# Altium PCB PCB - OSSM Wireless v0.4.pcbdoc (part 2 of 2)
Units mm, origin at the board's own origin, x right, y up, seen from the top; angles counter-clockwise.
Board outline 142.7 x 72.7 mm, 4 copper layers (Top Layer, 3v3 - all domains, GND, Bottom Layer); 90 components, 64 nets, 371 pads, 137 vias.
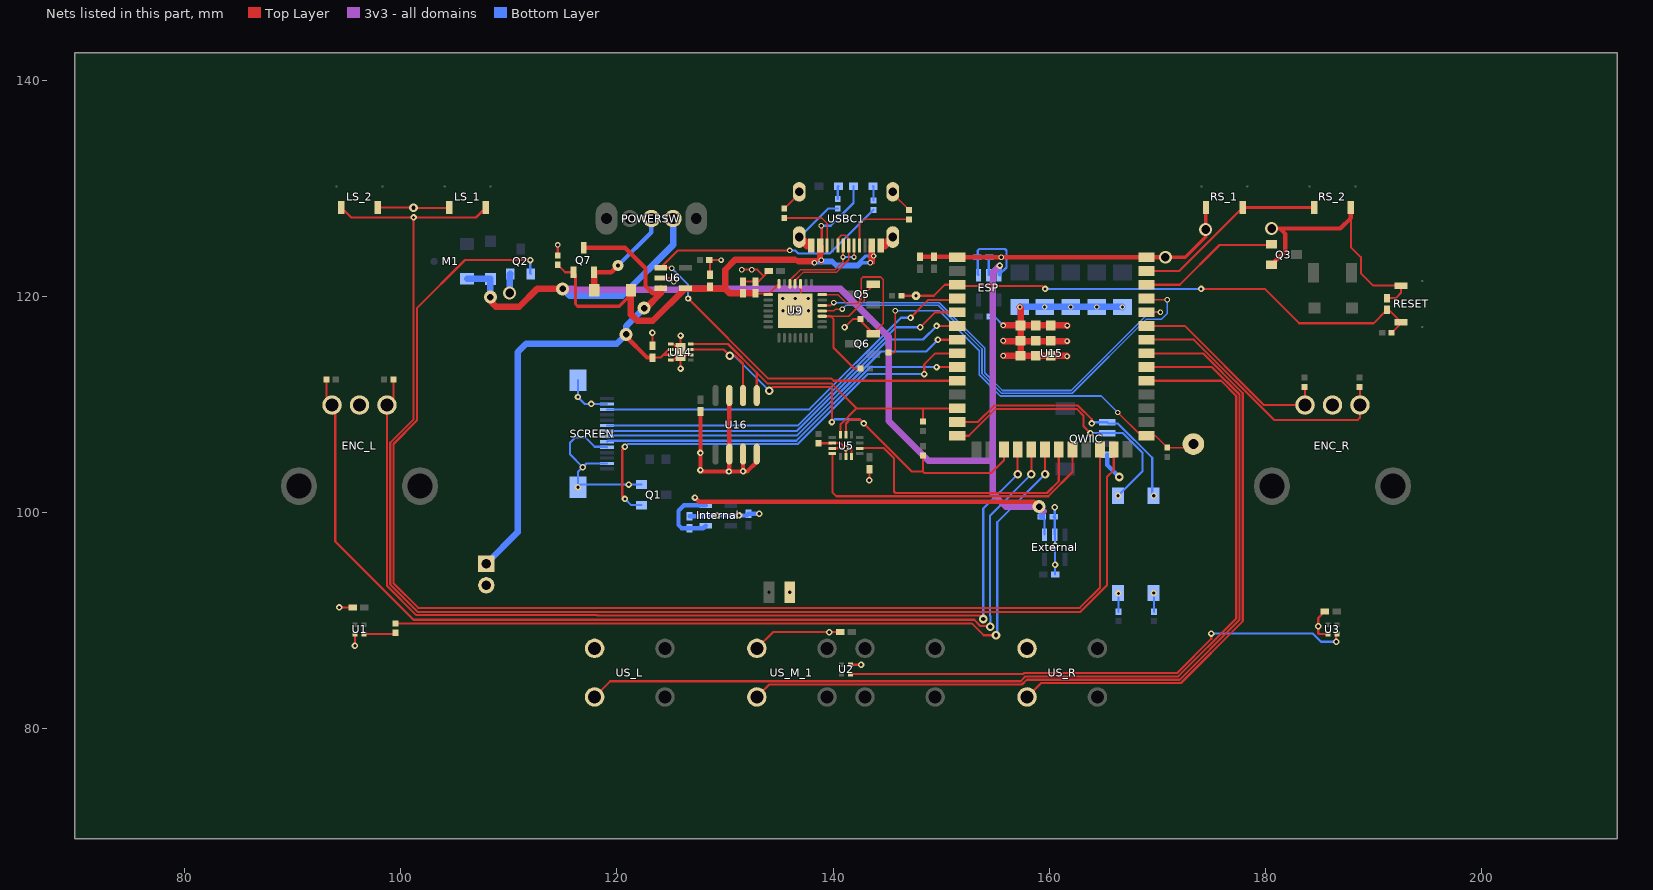
[diagram p4: the nets of this part, all layers, seen from the top]

## Via types
v1: diameter 0.6, hole 0.3, Top Layer to Bottom Layer, 73 vias
v2: diameter 0.5, hole 0.3, Top Layer to Bottom Layer, 39 vias
v3: diameter 0.8, hole 0.4, Top Layer to Bottom Layer, 14 vias
v4: diameter 1.2, hole 0.6, Top Layer to Bottom Layer, 6 vias
v5: diameter 1.2, hole 0.8, Top Layer to Bottom Layer, 4 vias
v6: diameter 1, hole 0.4, Top Layer to Bottom Layer, 1 vias

## Nets (pads, with @x,y where several pads share a name; then routed paths per layer and width w, separated by ;. In a path a pad name is that pad's centre, name@x,y a point inside that pad or via, vN(x,y) a via of type N, cw(c..) or ccw(c..) an arc to the next point about the centre after c; other vN are vias at no path point) (continued)
$1N7169: U2.1 U3.4 | length 47.8
  Top Layer w0.2: U2.1@141.625,85.075 157.602,85.075 157.681,85.154 171.813,85.154 174.982,88.323 v1(174.982,88.82) ; v1(186.539,88.058) 186.539,88.689 U3.4@186.625,88.775
  Bottom Layer w0.2: v1(174.982,88.82) 184.38,88.82 185.142,88.058 v1(186.539,88.058)
$1N7211: R19.2 U1.4 | length 3
  Top Layer w0.2: U1.4@96.625,88.775 99.424,88.775 R19.2@99.544,88.895
$1N7682: R21.1 USBC1.B5 | length 6.2
  Top Layer w0.15: R21.1@135.485,127.249 138.966,127.249 139.45,126.765 USBC1.B5@139.45,124.726
$1N7686: R20.1 USBC1.A5 | length 6.7
  Top Layer w0.15: USBC1.A5@142.45,124.726 142.45,126.646 142.926,127.122 R20.1@147.042,127.122
$1N21887: Green_Power.1 R34.2 | length 1.2
  Bottom Layer w0.2: R34.2@140.438,129.004 140.438,130.138 Green_Power.1@140.5,130.2
$1N42876: P-UP-1.2 R35.1 | length 1.7
  Bottom Layer w0.2: P-UP-1.2@166.365,92.559 v1(166.398,92.526) R35.1@166.398,90.828
$1N42918: P-UP-2.2 R36.1 | length 1.7
  Bottom Layer w0.2: v1(169.659,92.559) 169.7,92.518 R36.1@169.7,90.828
$1N54043: D3.1 POWERSW.2 Q7.2 | length 9.8
  Top Layer w0.4: Q7.2@117.898,122.229 119.491,122.229 v6(120.118,122.856)
  Top Layer w0.6: Q7.2@117.898,122.229 117.918,122.209 D3.1@117.918,120.57
  Bottom Layer w0.4: v6(120.118,122.856) 123.2,125.938 POWERSW.2@123.2,127.2
  Bottom Layer w0.6: POWERSW.2@123.166,127.166 POWERSW.2@123.2,127.2
BTN_CENTRE: U15.32 US_M_1.3 | length 78.1
  Top Layer w0.2: US_M_1.3@132.95,82.95 134.102,84.102 157.483,84.102 157.931,84.55 172.063,84.55 177.601,90.088 177.601,110.92 175.058,113.463 U15.32@169,113.463
BTN_L_SHOULDER: LS_1.4 LS_2.3 U15.25 | length 130.2
  Top Layer w0.2: LS_2.3@94.5,128.225 95.424,127.301 v1(101.205,127.301) ; LS_1.4@107.9,128.225 106.976,127.301 v1(101.205,127.301) ; U15.25@165.965,105.833 165.965,103.933 165.33,103.298 165.33,93.265 162.886,90.821 101.572,90.821 99.042,93.351 99.042,106.479 101.205,108.642 v1(101.205,127.301)
BTN_LEFT: U15.31 US_L.3 | length 91.8
  Top Layer w0.2: US_L.3@117.95,82.95 117.95,82.969 119.385,84.404 157.358,84.404 157.806,84.852 171.938,84.852 177.299,90.213 177.299,110.795 175.901,112.193 U15.31@169,112.193
BTN_R_SHOULDER: RS_1.4 RS_2.3 U15.39 | length 17.9
  Top Layer w0.2: U15.39@169,122.353 172.028,122.353 RS_1.4@177.9,128.225
  Top Layer w0.3: RS_1.4@177.9,128.225 RS_2.3@184.5,128.225
BTN_RIGHT: U15.33 US_R.3 | length 54.4
  Top Layer w0.2: US_R.3@157.95,82.95 159.248,84.248 172.188,84.248 177.903,89.963 177.903,111.045 174.215,114.733 U15.33@169,114.733
BUZZER: Q3.1 U15.38 | length 13.1
  Top Layer w0.2: U15.38@169,121.083 172.066,121.083 175.744,124.761 180.502,124.761 Q3.1@180.563,124.822
CHARGE_LED: Blue_Charge.1 R16.1 | length 1.3
  Bottom Layer w0.2: Blue_Charge.1@143.7,130.2 143.74,130.16 R16.1@143.74,128.877
CHARGE_TO_MCU: R16.2 U6.1 U15.10 | length 54.7
  Top Layer w0.2: v2(125.087,122.599) 125.023,122.663 U6.1@124.044,122.663 125.634,124.253 v2(135.993,124.253) ; v1(126.595,119.808) 134.01,112.393 139.852,112.393 140.052,112.193 U15.10@151.5,112.193
  Bottom Layer w0.2: v2(125.087,122.599) 126.595,121.091 v1(126.595,119.808) ; v2(135.993,124.253) 136.511,124.253 136.792,123.973 139.701,123.973 R16.2@143.74,128.011
CP_DTR: Q6.2 R7.1 U9.28 | length 17.2
  Top Layer w0.15: U9.28@139.001,120.166 140.451,120.166 141.296,119.321 142.237,119.321 142.62,119.704 142.62,121.642 142.77,121.792 144.423,121.792 144.629,121.586 144.629,117.472 Q6.2@143.724,116.567
  Top Layer w0.2: v1(141.073,117.141) 141.835,117.903 R7.1@142.545,117.903 142.545,117.746 Q6.2@143.724,116.567
CP_RTS: Q5.2 R8.1 U9.24 | length 12.7
  Top Layer w0.15: 139.795,118.165 141.462,118.165 142.872,119.575 142.872,120.191 143.724,121.043 Q5.2@143.724,121.139
  Top Layer w0.2: U9.24@139.001,118.165 139.795,118.165 140.057,117.903 140.057,115.236 141.962,113.331 R8.1@142.545,113.331
ENC_L_A: ENC_L.B R22.2 U15.19 | length 97.1
  Top Layer w0.2: R22.2@93.142,112.315 93.142,110.468 ENC_L.B@93.66,109.95 93.956,109.654 93.956,97.329 101.195,90.09 153.057,90.09 153.63,89.517 154.473,89.517 v3(154.535,89.455) ; v3(158.345,103.552) U15.19@158.345,105.833
  Bottom Layer w0.2: v3(154.535,89.455) 154.535,89.882 154.552,89.899 154.552,90.439 154.535,90.456 154.535,99.742 v3(158.345,103.552)
ENC_L_B: ENC_L.A R23.2 U15.18 | length 92.7
  Top Layer w0.2: R23.2@99.342,112.315 99.342,110.552 ENC_L.A@98.74,109.95 98.74,93.226 101.447,90.519 118.171,90.519 118.219,90.471 153.598,90.471 v3(153.9,90.169) ; v3(157.075,103.552) U15.18@157.075,105.833
  Bottom Layer w0.2: v3(153.9,90.169) 153.9,100.377 v3(157.075,103.552)
ENC_R_A: ENC_R.B R24.2 U15.35 | length 19.4
  Top Layer w0.2: U15.35@169,117.273 172.529,117.273 179.852,109.95 ENC_R.B@183.66,109.95 183.66,111.586 R24.2@183.618,111.628
ENC_R_B: ENC_R.A R25.2 U15.34 | length 25.8
  Top Layer w0.2: U15.34@169,116.003 173.372,116.003 180.797,108.578 188.54,108.578 188.74,108.778 ENC_R.A@188.74,109.95 188.74,111.586 R25.2@188.698,111.628
ESP_EN: C6.1 pad.1@147.677,120.062 R9.2 R26.1 RESET.4 U15.3 | length 50.6
  Top Layer w0.2: R9.2@146.332,120.062 pad.1@147.677,120.062 149.328,120.062 150.349,121.083 U15.3@151.5,121.083 151.632,120.951 159.361,120.951 v1(159.615,120.697) ; v1@173.839,120.697 179.935,120.697 183.11,117.522 190.005,117.522 C6.1@191.238,118.755 191.394,118.755 RESET.4@192.549,117.6 192.549,117.511 R26.1@191.671,116.633
  Bottom Layer w0.2: v1(159.615,120.697) v1(174.046,120.697)
ESP_IO0: pad.1@173.331,106.346 R10.2 R32.1 U15.27 | length 38.7
  Top Layer w0.15: R10.2@145.137,114.803 145.645,114.803 145.751,114.909 v2(145.751,118.665) ; v2(166.346,109.267) 168.5,107.113 U15.27@169,107.113 169.822,107.113 R32.1@170.918,106.017 173.002,106.017 pad.1@173.331,106.346
  Bottom Layer w0.15: v2(145.751,118.665) 149.836,118.665 153.519,114.982 153.519,112.745 155.471,110.793 156.565,110.793 156.567,110.791 164.822,110.791 v2(166.346,109.267)
ESP_RXD: U9.26 U15.36 | length 40.4
  Top Layer w0.15: U9.26@139.001,119.166 139.796,119.166 v2(140.057,119.427) ; U15.36@169,118.543 169.005,118.538 v2(170.283,118.538)
  Bottom Layer w0.15: v2(140.057,119.427) 149.836,119.427 154.027,115.236 154.027,112.95 155.68,111.297 162.026,111.297 169.267,118.538 v2(170.283,118.538)
ESP_TXD: U9.25 U15.37 | length 43.1
  Top Layer w0.15: U9.25@139.001,118.665 140.097,118.665 140.262,118.831 v2(140.858,118.831) ; U15.37@169,119.813 169.132,119.681 v2(170.918,119.681)
  Bottom Layer w0.15: v2(140.858,118.831) 141.2,119.173 149.734,119.173 153.775,115.132 153.775,112.846 155.576,111.045 162.13,111.045 168.988,117.903 170.41,117.903 170.918,118.411 v2(170.918,119.681)
EXT_1: P-UP-1.1 QWIIC.3 U15.14 | length 25.3
  Top Layer w0.2: U15.14@151.5,107.113 152.554,107.113 155.041,109.6 162.538,109.6 163.171,108.967 163.171,107.997 v1(163.806,107.362)
  Bottom Layer w0.2: v1(163.806,107.362) 165.355,107.362 QWIIC.3@165.363,107.354 165.37,107.362 166.808,107.362 168.632,105.538 168.632,103.826 v1(166.365,101.559)
EXT_2: P-UP-2.1 QWIIC.4 U15.13 | length 24.5
  Top Layer w0.2: U15.13@151.5,108.383 153.397,108.383 154.916,109.902 162.663,109.902 163.933,108.632 v1(163.933,108.251)
  Bottom Layer w0.2: v1(163.933,108.251) 164.036,108.354 QWIIC.4@165.363,108.354 165.466,108.251 166.346,108.251 169.521,105.076 169.521,101.696 v1(169.659,101.559)
GND: C6.2 C8.1 C9.1 C10.1 C11.1 C14.1 C15.2 C16.2 C17.2 C18.2 C19.2 C20.2 C23.1 C24.1 C25.1 C26.1 C27.1 C28.1 C29.1 C30.1 C32.1 C33.1 C34.1 C35.1 ENC_L.C ENC_R.C ESP.2 External.2 Internal.2 LS_1.3 LS_2.4 pad.1@135.993,92.63 Q1.2 Q2.2 Q3.2 QWIIC.1 R11.1 R18.2 R20.2 R21.2 R34.1 R39.2 RESET.3 RS_1.3 RS_2.4 SCREEN.2 SCREEN.5 SCREEN.13 SCREEN.15 SCREEN.16 U1.3 U2.3 U3.3 U5.2 U5.3 U5.6 U5.7 U6.2 U8.2 U9.3 U9.29 U14.1 U14.4 U14.6 U14.9 U15.1 U15.40 U15.41 U16.2 U16.3 U16.4 U16.7 US_L.1 US_M_1.1 US_R.1 USBC1.0 USBC1.1 USBC1.2 USBC1.3 USBC1.A1 USBC1.A12 USBC1.B1 USBC1.B12 | length 210.6
  Top Layer w0.15: R21.2@135.485,128.115 136.875,129.505 USBC1.2@136.875,129.674 ; v2(136.501,118.665) 137.002,119.166 U9.3@137.002,121.165 ; USBC1.3@145.525,129.674 145.525,129.505 R20.2@147.042,127.988
  Top Layer w0.2: v1(94.337,91.233) C15.2@95.57,91.233 ; v1(95.775,87.677) U1.3@95.775,88.775 ; LS_2.4@97.9,128.225 101.16,128.225 v3(101.195,128.19) 104.465,128.19 LS_1.3@104.5,128.225 ; R39.2@114.53,123.797 v2(114.53,124.761) ; C27.1@123.298,115.437 v1(123.298,116.633) ; U6.2@124.044,121.713 124.88,121.713 v2(125.261,121.332) ; U14.4@124.972,114.103 125.221,114.103 U14.9@125.9,114.782 ; U14.1@124.972,115.603 125.221,115.603 125.7,115.124 125.7,115.053 U14.9@125.9,114.853 ; v1(125.9,113.331) U14.9@125.9,114.782 ; v1(125.9,116.379) U14.9@125.9,114.853 ; U14.6@126.827,114.603 126.15,114.603 U14.9@125.935,114.818 ; C14.1@128.627,122.004 128.627,123.289 R18.2@128.552,123.364 v2(129.643,123.364) ; v2(131.548,122.475) v2(132.481,122.475) 132.989,122.475 133.584,121.881 ; C11.1@131.675,121.369 133.072,121.369 133.584,121.881 ; US_M_1.1@132.95,87.45 134.447,88.947 v1(139.653,88.947) C16.2@140.655,88.947 ; C9.1@134.051,122.348 133.584,121.881 ; R11.1@138.66,106.421 139.909,106.421 U5.2@139.938,106.45 140.659,106.45 v1(141.159,105.95) ; U5.3@139.938,105.95 v1(141.159,105.95) ; U5.6@141.2,105.188 141.2,105.909 v1(141.159,105.95) ; U2.3@141.625,85.925 v1(142.597,85.925) ; U5.7@141.7,105.188 141.708,105.196 141.708,105.95 v1(141.159,105.95) ; v1(143.359,103.007) C26.1@143.359,104.023 ; C17.2@185.486,90.852 184.888,90.254 v1(184.888,89.498) 184.888,88.82 184.933,88.775 U3.3@185.775,88.775 ; 187.9,127.265 187.9,124.543 188.825,123.618 188.825,122.143 189.968,121 RESET.3@192.549,121 192.549,120.357 192.037,119.845 C6.2@191.238,119.845 ; U14.9@125.9,114.782 U14.9@125.9,114.853 ; U14.9@125.9,114.782 U14.9@125.935,114.818 ; U14.9@125.9,114.853 U14.9@125.935,114.818
  Top Layer w0.3: v5(170.737,123.623) 172.574,123.623 174.474,125.523 v5(174.474,126.196) 174.474,128.199 RS_1.3@174.5,128.225
  Top Layer w0.4: C35.1@127.738,109.357 v1(127.738,105.519) v1(127.738,103.933) 127.865,103.806 v1(130.369,103.806) ; U16.7@130.405,110.829 U16.2@130.405,105.419 130.405,103.842 v1(130.369,103.806) ; U16.3@131.675,105.419 v1(131.675,103.835) v1@131.646,103.806 ; U16.4@132.945,105.419 132.945,104.695 132.056,103.806 v1@131.646,103.806 ; C34.1@148.058,123.655 C8.1@149.328,123.655 151.468,123.655 U15.1@151.5,123.623 U15.40@169,123.623 v5(170.737,123.623) ; Q3.2@180.563,122.922 181.84,124.199 181.84,125.777 181.332,126.285 ; v5(180.57,126.285) 181.332,126.285 ; RS_2.4@187.9,128.225 187.9,127.265 186.92,126.285 181.332,126.285 ; v1(130.369,103.806) v1@131.646,103.806
  Top Layer w0.6: v2(155.745,114.503) U15.41@157.35,114.503 ; v2(155.745,115.91) 155.783,115.871 U15.41@157.35,115.871 ; v2(155.745,117.315) U15.41@157.35,117.315 ; v2(157.285,119.023) 157.35,118.958 U15.41@157.35,117.315 ; v2(161.647,114.474) 161.618,114.503 U15.41@160.15,114.503 U15.41@158.75,114.503 U15.41@157.35,114.503 ; v2(161.647,115.871) U15.41@157.35,115.871 ; v2(161.674,117.303) 161.662,117.315 U15.41@157.35,117.315 ; U15.41@157.35,114.503 U15.41@157.35,115.871 ; U15.41@157.35,115.871 U15.41@157.35,115.903 U15.41@157.35,117.303 U15.41@157.35,117.315
  Top Layer w0.8: USBC1.1@136.875,125.494 137.643,124.726 USBC1.A12@137.85,124.726 ; USBC1.A1@144.55,124.726 144.757,124.726 USBC1.0@145.525,125.494
  Bottom Layer w0.2: SCREEN.15@116.402,112.248 v1(116.402,110.697) 117.049,110.05 v1(117.641,110.05) SCREEN.13@119.082,110.05 ; SCREEN.2@119.081,104.55 117.197,104.55 v1(116.853,104.206) ; SCREEN.5@119.082,106.05 119.04,106.092 117.959,106.092 117.07,106.981 116.181,106.981 115.673,106.473 115.673,105.386 v1(116.853,104.206) ; Q1.2@122.27,102.597 v1(121.109,102.597) 116.647,102.597 v1(116.402,102.352) 116.402,103.755 v1(116.853,104.206) ; USBC1.1@136.875,125.494 136.913,125.494 139.557,128.138 R34.1@140.438,128.138 ; ESP.2@154.408,121.978 154.408,123.581 C18.2@154.445,123.618 v2(155.551,123.618) ; C23.1@154.572,118.157 154.903,118.157 v2(155.745,117.315) ; v1(160.504,100.504) 160.504,99.705 C20.2@160.414,99.615 160.504,99.525 External.2@160.504,97.975 160.541,97.938 v1(160.541,96.95) v1(160.541,95.173) C25.1@160.541,94.281
  Bottom Layer w0.4: C19.2@126.722,99.652 128.145,99.652 Internal.2@128.235,99.742 v1(129.236,99.742) v1(131.312,99.742) 132.019,99.742 C24.1@132.183,99.906 v1(133.183,99.906) v1@133.199,99.89 ; QWIIC.1@165.363,105.354 165.363,104.408 v3(166.473,103.298)
  Bottom Layer w0.6: v5(110.085,120.316) 110.085,122.021 Q2.2@110.151,122.087 ; v2(157.285,119.023) v2(159.571,119.023) v2(161.984,119.023) v2(164.397,119.023) 166.767,119.023 v2(166.77,119.019)
  other v2: 135.375,118.665 137.725,118.665 135.358,119.808 136.501,119.808 137.702,119.808
GYRO_INT1: U5.4 U15.22 | length 28.9
  Top Layer w0.2: U5.4@139.938,105.45 139.938,101.893 140.311,101.52 159.915,101.52 162.155,103.76 U15.22@162.155,105.833
GYRO_INT2: U5.9 U15.21 | length 25.3
  Top Layer w0.2: U5.9@142.462,105.95 142.477,105.965 144.71,105.965 145.645,105.03 145.645,101.963 145.786,101.822 159.79,101.822 160.885,102.917 U15.21@160.885,105.833
LED_PIXELS: R19.1 U15.20 | length 75.1
  Top Layer w0.2: R19.1@99.544,89.761 152.832,89.761 153.938,88.655 v3(155.081,88.655) ; v3(159.615,103.552) U15.20@159.615,105.833
  Bottom Layer w0.2: v3(155.081,88.655) 155.187,88.761 155.187,99.124 v3(159.615,103.552)
S_A0: SCREEN.7 U15.7 | length 36.1
  Top Layer w0.2: v1(149.709,115.998) 151.495,115.998 U15.7@151.5,116.003
  Bottom Layer w0.2: SCREEN.7@119.082,107.05 119.18,107.148 136.679,107.148 144.444,114.913 148.624,114.913 v1(149.709,115.998)
S_BACKLIGHT: Q1.1 U15.8 | length 41.6
  Top Layer w0.2: v1(120.753,101.266) 120.499,101.52 120.499,105.838 v1(120.753,106.092) ; v1(148.439,112.823) 148.439,113.712 149.46,114.733 U15.8@151.5,114.733
  Bottom Layer w0.2: v1(120.753,101.266) 121.322,100.697 Q1.1@122.27,100.697 ; v1(120.753,106.092) 121.007,106.346 136.732,106.346 143.208,112.823 v1(148.439,112.823)
S_CS: SCREEN.12 U15.4 | length 36.7
  Top Layer w0.2: v1(147.169,118.03) 148.82,119.681 151.368,119.681 U15.4@151.5,119.813
  Bottom Layer w0.2: SCREEN.12@119.082,109.55 137.8,109.55 146.28,118.03 v1(147.169,118.03)
S_RES: SCREEN.6 U15.9 | length 35.3
  Top Layer w0.2: v1(149.582,113.463) U15.9@151.5,113.463
  Bottom Layer w0.2: SCREEN.6@119.082,106.55 119.18,106.648 136.606,106.648 143.421,113.463 v1(149.582,113.463)
S_SCK: SCREEN.9 U15.5 | length 36.8
  Top Layer w0.2: v1(148.058,117.141) 149.46,118.543 U15.5@151.5,118.543
  Bottom Layer w0.2: SCREEN.9@119.082,108.05 136.727,108.05 145.818,117.141 v1(148.058,117.141)
S_SDA: SCREEN.8 U15.6 | length 36.4
  Top Layer w0.2: v1(149.582,117.268) 151.495,117.268 U15.6@151.5,117.273
  Bottom Layer w0.2: SCREEN.8@119.082,107.55 136.654,107.55 145.12,116.015 148.329,116.015 v1(149.582,117.268)
SCL: R41.2 U5.13 U14.7 U15.17 U16.6 | length 46.5
  Top Layer w0.2: U14.7@126.827,115.103 129.87,115.103 v3(130.452,114.521) 130.947,114.521 131.675,113.793 U16.6@131.675,110.829 ; v3(134.088,111.282) 134.438,111.632 139.757,111.632 139.894,111.495 v1(139.894,108.378) ; U5.13@141.2,107.212 141.2,108.251 141.581,108.632 142.47,108.632 142.851,108.251 147.296,103.806 148.312,103.806 ; R41.2@148.312,105.278 148.312,103.806 ; U15.17@155.805,105.833 155.805,104.822 154.662,103.679 148.439,103.679 148.312,103.806
  Bottom Layer w0.2: v3(130.452,114.521) 130.849,114.521 v3(134.088,111.282) ; v1(139.894,108.378) 140.148,108.632 142.47,108.632 v1(142.851,108.251)
SDA: R40.2 U5.14 U14.8 U15.12 U16.5 | length 33.5
  Top Layer w0.2: U14.8@126.827,115.603 130.292,115.603 132.953,112.942 ; U16.5@132.945,110.829 132.945,112.934 132.953,112.942 ; U5.14@140.7,107.212 140.7,108.178 142.17,109.648 ; R40.2@148.312,108.43 148.312,109.613 148.277,109.648 ; U15.12@151.5,109.653 151.495,109.648 148.277,109.648 ; 132.953,112.942 133.961,111.934 139.884,111.934 142.17,109.648 ; 142.17,109.648 148.277,109.648
USB+: U9.4 USBC1.A6 USBC1.B6 | length 9.9
  Top Layer w0.15: U9.4@136.501,121.165 136.501,121.494 137.228,122.221 140.286,122.221 141.45,123.385 USBC1.A6@141.45,124.726 141.454,124.73 141.454,125.343 141.147,125.65 140.753,125.65 140.45,125.347 USBC1.B6@140.45,124.726
USB-: U9.5 USBC1.A7 USBC1.B7 | length 9.6
  Top Layer w0.15: U9.5@136.001,121.165 136.001,121.494 136.982,122.475 140.184,122.475 140.925,123.216 v2(140.925,123.641) 140.925,124.701 USBC1.A7@140.95,124.726 ; v2(141.939,123.641) 141.95,123.653 USBC1.B7@141.95,124.726
  Bottom Layer w0.15: v2(140.925,123.641) v2(141.939,123.641) v2@141.962,123.618
V_BAT_IN: C27.2 Q7.3 U6.3 U8.1 U14.2 U14.3 | length 53.1
  Top Layer w0.2: C27.2@123.298,114.347 124.055,114.347 124.311,114.603 ; U14.3@124.972,114.603 124.311,114.603 ; U14.2@124.972,115.103 124.811,115.103 124.311,114.603
  Top Layer w0.4: Q7.3@116.943,124.499 120.761,124.499 122.658,122.602 122.658,120.951 123.322,120.287 124.076,120.287 ; v4(120.868,116.494) 120.868,116.264 122.785,114.347 C27.2@123.298,114.347
  Top Layer w0.6: v4(122.531,118.919) 122.708,118.919 124.076,120.287 124.076,120.731 U6.3@124.044,120.763
  Bottom Layer w0.6: U8.1@107.926,95.281 110.847,98.202 110.847,114.855 111.609,115.617 119.991,115.617 v4(120.868,116.494) 120.868,117.256 v4(122.531,118.919)
V_BAT_SWITCHED: C18.1 C19.1 C20.1 D2.1 ESP.1 ESP.3 External.1 Internal.1 Internal.3 M1.1 POWERSW.3 | length 156.8
  Top Layer w0.4: v1(127.23,101.393) 127.63,100.993 158.618,100.993 v4(159.06,100.551)
  Top Layer w0.6: v4(108.307,119.935) 108.307,119.554 108.815,119.046 110.974,119.046 112.625,120.697 v4(114.996,120.697)
  3v3 - all domains w0.6: 116.181,120.57 116.121,120.63 ; v1(155.424,122.856) 154.789,122.221 154.789,104.822 ; 159.488,100.123 v4(159.06,100.551) 155.975,100.551 154.789,101.737 154.789,104.822 ; 116.121,120.63 115.063,120.63 v4(114.996,120.697) 116.054,120.697 116.121,120.63 ; 116.121,120.63 125.743,120.63 125.81,120.697 140.692,120.697 145.137,116.252 145.137,108.505 148.82,104.822 154.789,104.822
  Bottom Layer w0.2: ESP.1@153.458,121.978 153.392,122.044 153.392,124.253 153.533,124.394 155.912,124.394 156.053,124.253 156.053,122.673 ESP.3@155.424,122.044 ; C20.1@159.324,99.615 159.554,99.385 External.1@159.554,97.975
  Bottom Layer w0.4: v1(127.23,101.393) Internal.3@127.931,100.692 ; Internal.1@128.235,98.792 128.005,98.562 C19.1@126.722,98.562 126.714,98.57 125.989,98.57 125.706,98.853 125.706,100.184 126.214,100.692 Internal.3@127.931,100.692 ; Internal.3@128.235,100.692 Internal.3@127.931,100.692 ; ESP.3@155.424,122.044 v1(155.424,122.856)
  Bottom Layer w0.6: M1.1@106.149,121.637 108.299,121.637 D2.1@108.307,121.629 v4(108.307,119.935) ; v4(114.996,120.697) 115.631,120.062 120.499,120.062 125.2,124.763 POWERSW.3@125.2,127.2 ; v4(159.06,100.551) 159.324,100.287 C20.1@159.324,99.615
V_USB: Blue_Charge.2 C10.2 C11.2 C14.2 D3.2 Q7.1 R39.1 U6.4 U9.7 U9.8 USBC1.A4 USBC1.A9 USBC1.B4 USBC1.B9 | length 66.3
  Top Layer w0.2: R39.1@114.53,122.931 115.232,122.229 Q7.1@115.988,122.229 ; C10.2@132.818,120.279 U9.8@133.888,120.279 ; U9.8@134.001,120.166 U9.8@133.888,120.279 ; U9.7@135,121.165 134.114,120.279 U9.8@133.888,120.279 ; v2(138.914,126.539) 138.95,126.503 USBC1.B4@138.95,124.726
  Top Layer w0.3: Q7.1@115.988,122.229 116.181,122.036 116.181,119.3 116.393,119.088 120.245,119.088 D3.2@121.302,120.145 ; USBC1.A9@138.65,124.726 138.66,124.716 138.66,123.491 ; v2@138.914,123.11 v2(138.914,123.344) ; USBC1.B4@138.95,124.726 138.998,124.678 138.998,123.951 138.914,123.867 v2(138.914,123.344) ; v2(143.45,123.11) USBC1.B9@143.45,124.726 ; 143.74,123.11 143.75,123.12 v2(143.75,123.736) USBC1.A4@143.75,124.726 ; 138.579,123.41 136.455,123.41 136.755,123.11 v2(138.279,123.11) 138.579,123.41 ; 138.579,123.41 138.66,123.491 ; 138.66,123.491 138.767,123.491 v2(138.914,123.344)
  Top Layer w0.6: D3.2@121.302,120.57 121.302,120.145 121.302,118.326 121.889,117.74 123.329,117.74 U6.4@126.352,120.763 126.418,120.697 130.024,120.697 ; C10.2@132.818,120.279 C11.2@131.675,120.279 130.442,120.279 130.024,120.697 ; 136.455,123.41 130.959,123.41 130.024,122.475 130.024,120.697
  Bottom Layer w0.2: v2(138.914,126.539) 139.803,126.539 141.9,128.636 Blue_Charge.2@141.9,130.2
  Bottom Layer w0.3: v2(138.279,123.11) 139.93,123.11 140.311,122.729 142.343,122.729 142.724,123.11 v2(143.45,123.11) ; v2(138.914,123.344) 138.934,123.364 139.93,123.364 140.311,122.983 142.225,122.983 142.978,123.736 v2(143.75,123.736)
VIBRATOR: Q2.1 U15.24 | length 119.8
  Top Layer w0.2: v1(111.99,123.364) 105.952,123.364 101.507,118.919 101.507,108.517 99.344,106.354 99.344,93.476 101.628,91.193 162.83,91.193 164.695,93.057 U15.24@164.695,105.833
  Bottom Layer w0.2: v1(111.99,123.364) 111.99,122.148 Q2.1@112.051,122.087
pads on no net: ENC_L.D ENC_L.E ENC_R.D ENC_R.E ESP.4 External.4 Internal.4 LS_1.1 LS_1.2 LS_2.1 LS_2.2 M1.3 POWERSW.1 POWERSW.4 POWERSW.5 QWIIC.5 QWIIC.6 RESET.1 RESET.2 RS_1.1 RS_1.2 RS_2.1 RS_2.2 SCREEN.1 SCREEN.14 U3.1 U5.10 U5.11 U9.1 U9.2 U9.9 U9.10 U9.11 U9.12 U9.13 U9.14 U9.15 U9.16 U9.17 U9.18 U9.19 U9.20 U9.21 U9.22 U9.23 U9.27 U14.5 U15.11 U15.15 U15.16 U15.26 U15.28 U15.29 U15.30 U16.1 US_L.2 US_L.4 US_M_2.2 US_M_2.4 US_R.2 US_R.4 USBC1.A8 USBC1.B8
copper on no net: | length 0.1
  Top Layer w0.6: 121.143,127.143 121.2,127.2

## Polygon pours and split planes (outlines as drawn)
3V3_INTERNAL on 3v3 - all domains (solid, remove dead copper): 89.2,131.2 193.2,131.2 cw(c193.2,128.2) 196.2,128.2 196.2,84.2 cw(c193.2,84.2) 193.2,81.2 89.2,81.2 cw(c89.2,84.2) 86.2,84.2 86.2,128.2 cw(c89.2,128.2)
GND on Top Layer (hatched 45Degree grid 30 track 10, remove dead copper, pour order 0): 156.783,119.797 160.663,119.797 cw(c160.663,117.797) 162.663,117.797 162.663,114.061 cw(c160.663,114.061) 160.663,112.061 156.783,112.061 cw(c156.783,114.061) 154.783,114.061 154.783,117.797 cw(c156.783,117.797)

## Keep-outs
Board Outline Layer:
  circle w0.025: c90.2,126.2 r1.7
  region: 91.9,126.2 cw(c90.2,126.2) 88.5,126.2 cw(c90.2,126.2)
  circle w0.025: c90.2,86.2 r1.7
  region: 91.9,86.2 cw(c90.2,86.2) 88.5,86.2 cw(c90.2,86.2)
  circle w0.025: c192.2,126.2 r1.7
  region: 193.9,126.2 cw(c192.2,126.2) 190.5,126.2 cw(c192.2,126.2)
  circle w0.025: c192.2,86.2 r1.7
  region: 193.9,86.2 cw(c192.2,86.2) 190.5,86.2 cw(c192.2,86.2)
  region: 107.291,115.617 cw(c107.291,113.839) 109.069,113.839 109.069,99.742 cw(c107.291,99.742) 107.291,97.964 cw(c107.291,99.742) 105.513,99.742 105.513,113.839 cw(c107.291,113.839)
  region: 148.931,133.27 171.823,133.27 cw(c171.823,132.27) 172.823,132.27 172.823,125.761 cw(c171.823,125.761) 171.823,124.761 148.931,124.761 cw(c148.931,125.761) 147.931,125.761 147.931,132.27 cw(c148.931,132.27)
  lines w0.025: 105.513,99.742 ccw(c107.291,99.742) 107.291,97.964 ccw(c107.291,99.742) 109.069,99.742 109.069,113.839 ccw(c107.291,113.839) 107.291,115.617 ccw(c107.291,113.839) 105.513,113.839 105.513,99.742
  lines w0.1: 86.282,85.317 86.7,106.2 86.282,126.888 cw(c90.281,126.969) 90.263,130.968 141.2,131.2 192.137,130.968 cw(c192.119,126.969) 196.118,126.888 195.7,106.2 196.118,85.317 cw(c192.118,85.237) 192.082,81.237 141.2,81.7 90.318,81.237 cw(c90.282,85.237) 86.282,85.317

## Silkscreen, mask and mechanical layers (free items; w line width, h text height)
Top Silkscreen Layer:
  text "." at 119.991,119.3 h2
  text "." at 121.632,117.331 h2
  text "Beep, / Beep, / Motherfucker!" at 180.57,116.252 h1.2
  text "Y+" at 140.722,108.632 h2
  text "X+" at 144.121,105.457 h2
  text "3v3 Int" at 131.04,97.075 h2 r270
  text "GND" at 137.517,94.662 h2 r270
Bottom Silkscreen Layer:
  circle w0.102: c90.2,126.2 r2.5
  circle w0.102: c90.2,86.2 r2.5
  circle w0.102: c192.2,86.2 r2.5
  circle w0.102: c192.2,126.2 r2.5
  circle w0.2: c141.159,105.95 r1.902
  lines w0.254: 76.2,91.2 ccw(c91.2,91.2) 91.2,76.2 191.2,76.2 ccw(c191.2,91.2) 206.2,91.2 206.2,121.2 ccw(c191.2,121.2) 191.2,136.2 91.2,136.2 ccw(c91.2,121.2) 76.2,121.2 76.2,91.2
  text "ESP 3v3" at 164.187,123.364 h1.14
  text "Jiggly Bits" at 105.259,118.538 h2
  text "GND" at 164.314,116.633 h1.14
  text "3v3 Int" at 130.913,112.95 h2 r90
  text "GND" at 134.088,109.648 h2 r90
  text "Y+" at 142.343,108.378 h2
  text "X+" at 145.772,105.203 h2
  text "Z-" at 142.089,105.076 h2
  text "OSSM Wireless Remote v0.4" at 162.282,89.582 h3.05
  text "Silver Plates, work this time." at 154.916,84.248 h2
Mechanical Layer:
  circle w0.025: c90.2,126.2 r1.7
  circle w0.025: c90.2,86.2 r1.7
  circle w0.025: c192.2,126.2 r1.7
  circle w0.025: c192.2,86.2 r1.7
  lines w0.025: 105.513,99.742 ccw(c107.291,99.742) 107.291,97.964 ccw(c107.291,99.742) 109.069,99.742 109.069,113.839 ccw(c107.291,113.839) 107.291,115.617 ccw(c107.291,113.839) 105.513,113.839 105.513,99.742

## Text inside footprints (layer, text, board x,y; h text height)
P-UP-1: Bottom Silkscreen Layer "ON" at 165.954,94.559 h0.5 r180; Bottom Silkscreen Layer "1" at 166.175,100.189 h1 r180
P-UP-2: Bottom Silkscreen Layer "ON" at 169.248,94.559 h0.5 r180; Bottom Silkscreen Layer "1" at 169.469,100.189 h1 r180
U1: Top Silkscreen Layer "DO" at 95.597,89.483 h0.25; Top Silkscreen Layer "DI" at 96.497,88.634 h0.25
U2: Top Silkscreen Layer "DO" at 141.803,85.217 h0.25 r180; Top Silkscreen Layer "DI" at 140.903,86.066 h0.25 r180
U3: Top Silkscreen Layer "DO" at 185.597,89.483 h0.25; Top Silkscreen Layer "DI" at 186.497,88.634 h0.25